# EAGLE board BusPirate-ultra-testboard.v1.0 (EAGLE 9.1.3)
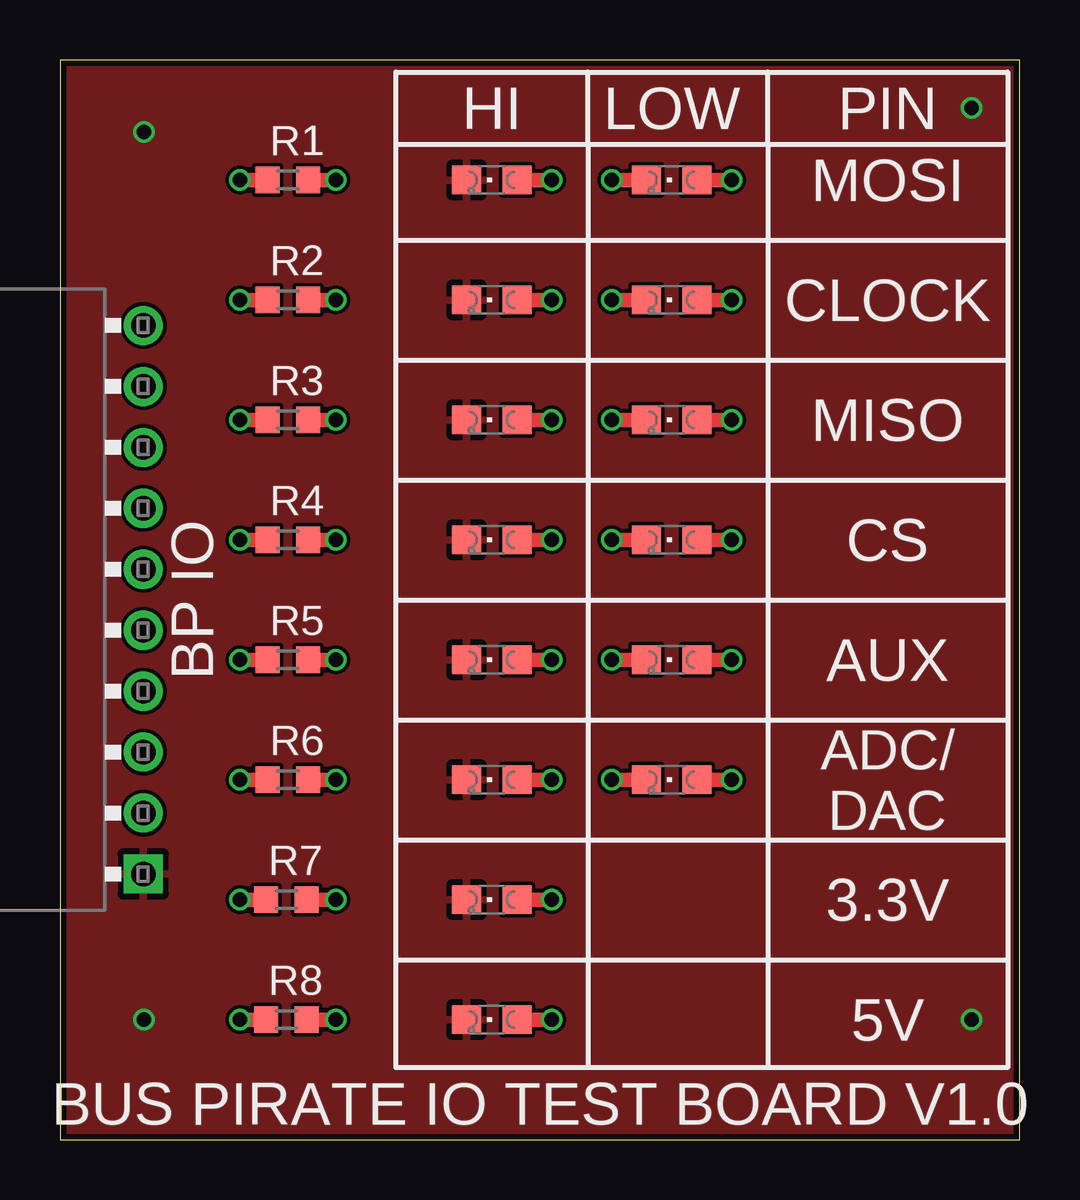
[diagram p0: board, top side]
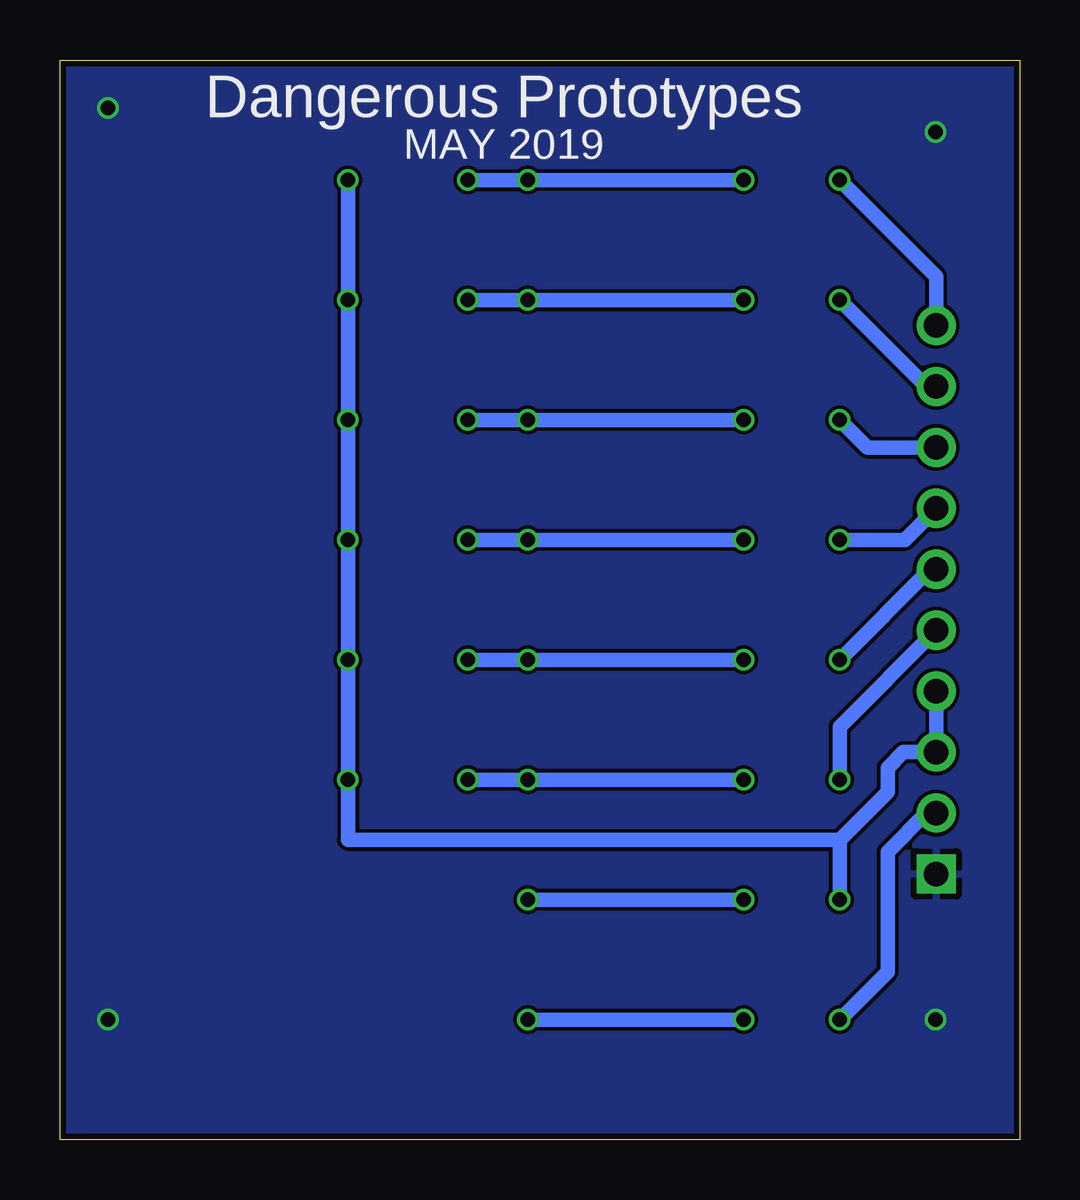
[diagram p1: board, bottom side, seen from below]

Size 40 x 45 mm. Coordinates in mm from the lower left corner, seen from the top.
Outline: 0,0 40,0 40,45 0,45 0,0
Copper layers (1*16): Top 0.035mm / dielectric 1.5mm / Bottom 0.035mm
Design rules "dirt_cheap_dirty_boards.v1.1": minimum track width 6mil, minimum drill 12mil, track to track 6mil, track to pad 6mil, pad to pad 6mil, via to via 6mil, smd to smd 0mil, copper to edge 10mil, drill to drill 10mil, minimum pad ring 10mil, minimum via ring 6mil, stop-mask expansion 2mil, vias tented up to drill 25mil, thermal gap 10mil

## Footprints (pad centres in the part's own frame; a part is rotated, then mirrored left to right if it is on the bottom)
M1X10_FEMALE_RIGHT_ANGLED_PTH = drill 1.02 pad 1.632 square: 1 -11.43,-5.85 | drill 1.02 pad 1.632: 2 -8.89,-5.85; 3 -6.35,-5.85; 4 -3.81,-5.85; 5 -1.27,-5.85; 6 1.27,-5.85; 7 3.81,-5.85; 8 6.35,-5.85; 9 8.89,-5.85; 10 11.43,-5.85
LED-805 = smd 1.2 x 1.2: A 0,-1.05; C 0,1.05
R603 = smd 1 x 1.1: 1 -0.85,0; 2 0.85,0

## Placement (x,y rotation side)
J1  CON_HEADER_1X10-RIGHT_ANGLED_PTH  [M1X10_FEMALE_RIGHT_ANGLED_PTH]  -2.38,22.5 90 top
LED1  [LED-805]  18,40 90 top
LED2  [LED-805]  25.5,40 90 top
LED3  [LED-805]  18,35 90 top
LED4  [LED-805]  25.5,35 90 top
LED5  [LED-805]  18,30 90 top
LED6  [LED-805]  25.5,30 90 top
LED7  [LED-805]  18,25 90 top
LED8  [LED-805]  25.5,25 90 top
LED9  [LED-805]  18,20 90 top
LED10  [LED-805]  25.5,20 90 top
LED11  [LED-805]  18,15 90 top
LED12  [LED-805]  25.5,15 90 top
LED13  [LED-805]  18,10 90 top
LED14  [LED-805]  18,5 90 top
PAGE1  FRAME_DINA4_L  [DP_LOGO]  -30.48,16.51 0 top  (outside the outline)
R1  1k1  [R603]  9.5,40 0 top
R2  1k1  [R603]  9.5,35 0 top
R3  1k1  [R603]  9.5,30 0 top
R4  1k1  [R603]  9.5,25 0 top
R5  1k1  [R603]  9.5,20 0 top
R6  1k1  [R603]  9.5,15 0 top
R7  1k1  [R603]  9.44,10 0 top
R8  1k1  [R603]  9.44,5 0 top

## Library data of the parts
J1 LED1-LED14 R1-R8 = dp_devices.v6
PAGE1 = dp_devices.v6; FF1: fulfillment by; FF2: Seeed Studio; FF3: www.seeedstudio.com; LICENSE: CC-BY-SA; PROJECT: Projectname; URL1: http://; URL2: DangerousPrototypes.com

## Nets
3V3: J1.3 J1.4 LED2.A LED4.A LED6.A LED8.A LED10.A LED12.A R7.1
5V0: J1.2 R8.1
ADC_DAC: J1.5 R6.1
AUX: J1.6 R5.1
CLOCK: J1.9 R2.1
CS: J1.7 R4.1
GND: J1.1 LED1.C LED3.C LED5.C LED7.C LED9.C LED11.C LED13.C LED14.C
MISO: J1.8 R3.1
MOSI: J1.10 R1.1
N$1: LED1.A LED2.C R1.2
N$2: LED3.A LED4.C R2.2
N$3: LED5.A LED6.C R3.2
N$4: LED7.A LED8.C R4.2
N$5: LED9.A LED10.C R5.2
N$6: LED11.A LED12.C R6.2
N$7: LED14.A R8.2
N$8: LED13.A R7.2

## Tracks (layer width: path | path; a pad name or v marks a point on that pad's centre or on a via)
3V3  (via drill 0.58)
  Top 0.61: R7.1 v7.5,10 | LED2.A v28,40 | LED4.A v28,35 | LED6.A v28,30 | LED8.A v28,25 | LED10.A v28,20 | LED12.A v28,15
  Bottom 0.61: J1.4 J1.3 4.85,16.15 5.5,15.5 5.5,14.5 7.5,12.5 | v7.5,10 7.5,12.5 | v28,40 v28,35 v28,30 v28,25 v28,20 v28,15 28,12.5 7.5,12.5
5V0  (via drill 0.58)
  Top 0.61: R8.1 v7.5,5
  Bottom 0.61: v7.5,5 5.5,7 5.5,12 3.89,13.61 J1.2
ADC_DAC  (via drill 0.58)
  Top 0.61: R6.1 v7.5,15
  Bottom 0.61: v7.5,15 7.5,17.2 J1.5
AUX  (via drill 0.58)
  Top 0.61: R5.1 v7.5,20
  Bottom 0.61: v7.5,20 3.73,23.77 J1.6
CLOCK  (via drill 0.58)
  Top 0.61: R2.1 v7.5,35
  Bottom 0.61: v7.5,35 3.89,31.39 J1.9
CS  (via drill 0.58)
  Top 0.61: R4.1 v7.5,25
  Bottom 0.61: v7.5,25 4.78,25 J1.7
GND  (via drill 0.58)
  other vias: 3.5,42 3.5,5 38,5 38,43
  pour Top: 0,45 40,45 40,0 0,0
  pour Bottom: 0,45 40,45 40,0 0,0
MISO  (via drill 0.58)
  Top 0.61: R3.1 v7.5,30
  Bottom 0.61: v7.5,30 6.35,28.85 J1.8
MOSI  (via drill 0.58)
  Top 0.61: v7.5,40 R1.1
  Bottom 0.61: J1.10 3.47,35.97 v7.5,40
N$1  (via drill 0.58)
  Top 0.61: R1.2 v11.5,40 | v20.5,40 LED1.A | LED2.C v23,40
  Bottom 0.61: v11.5,40 v20.5,40 v23,40
N$2  (via drill 0.58)
  Top 0.61: R2.2 v11.5,35 | LED4.C v23,35 | LED3.A v20.5,35
  Bottom 0.61: v23,35 v20.5,35 v11.5,35
N$3  (via drill 0.58)
  Top 0.61: R3.2 v11.5,30 | LED5.A v20.5,30 | LED6.C v23,30
  Bottom 0.61: v11.5,30 v20.5,30 v23,30
N$4  (via drill 0.58)
  Top 0.61: R4.2 v11.5,25 | LED7.A v20.5,25 | LED8.C v23,25
  Bottom 0.61: v11.5,25 v20.5,25 v23,25
N$5  (via drill 0.58)
  Top 0.61: R5.2 v11.5,20 | LED9.A v20.5,20 | LED10.C v23,20
  Bottom 0.61: v11.5,20 v20.5,20 v23,20
N$6  (via drill 0.58)
  Top 0.61: R6.2 v11.5,15 | LED11.A v20.5,15 | LED12.C v23,15
  Bottom 0.61: v11.5,15 v20.5,15 v23,15
N$7  (via drill 0.58)
  Top 0.61: R8.2 v11.5,5 | v20.5,5 LED14.A
  Bottom 0.61: v11.5,5 v20.5,5
N$8  (via drill 0.58)
  Top 0.61: R7.2 v11.5,10 | v20.5,10 LED13.A
  Bottom 0.61: v11.5,10 v20.5,10

## Text on the board
tPlace: HI | LOW | PIN | MOSI | CLOCK | MISO | CS | BP IO | AUX | ADC/ / DAC | 3.3V | 5V | BUS PIRATE IO TEST BOARD V1.0
bPlace: Dangerous Prototypes | MAY 2019